# Altium PCB Debugger.pcbdoc
Units mil, origin at the board's own origin, x right, y up, seen from the top; angles counter-clockwise.
Board outline 1695 x 1065 mil, 2 copper layers (Top Layer, Bottom Layer); 5 components, 19 nets, 43 pads, 30 vias.
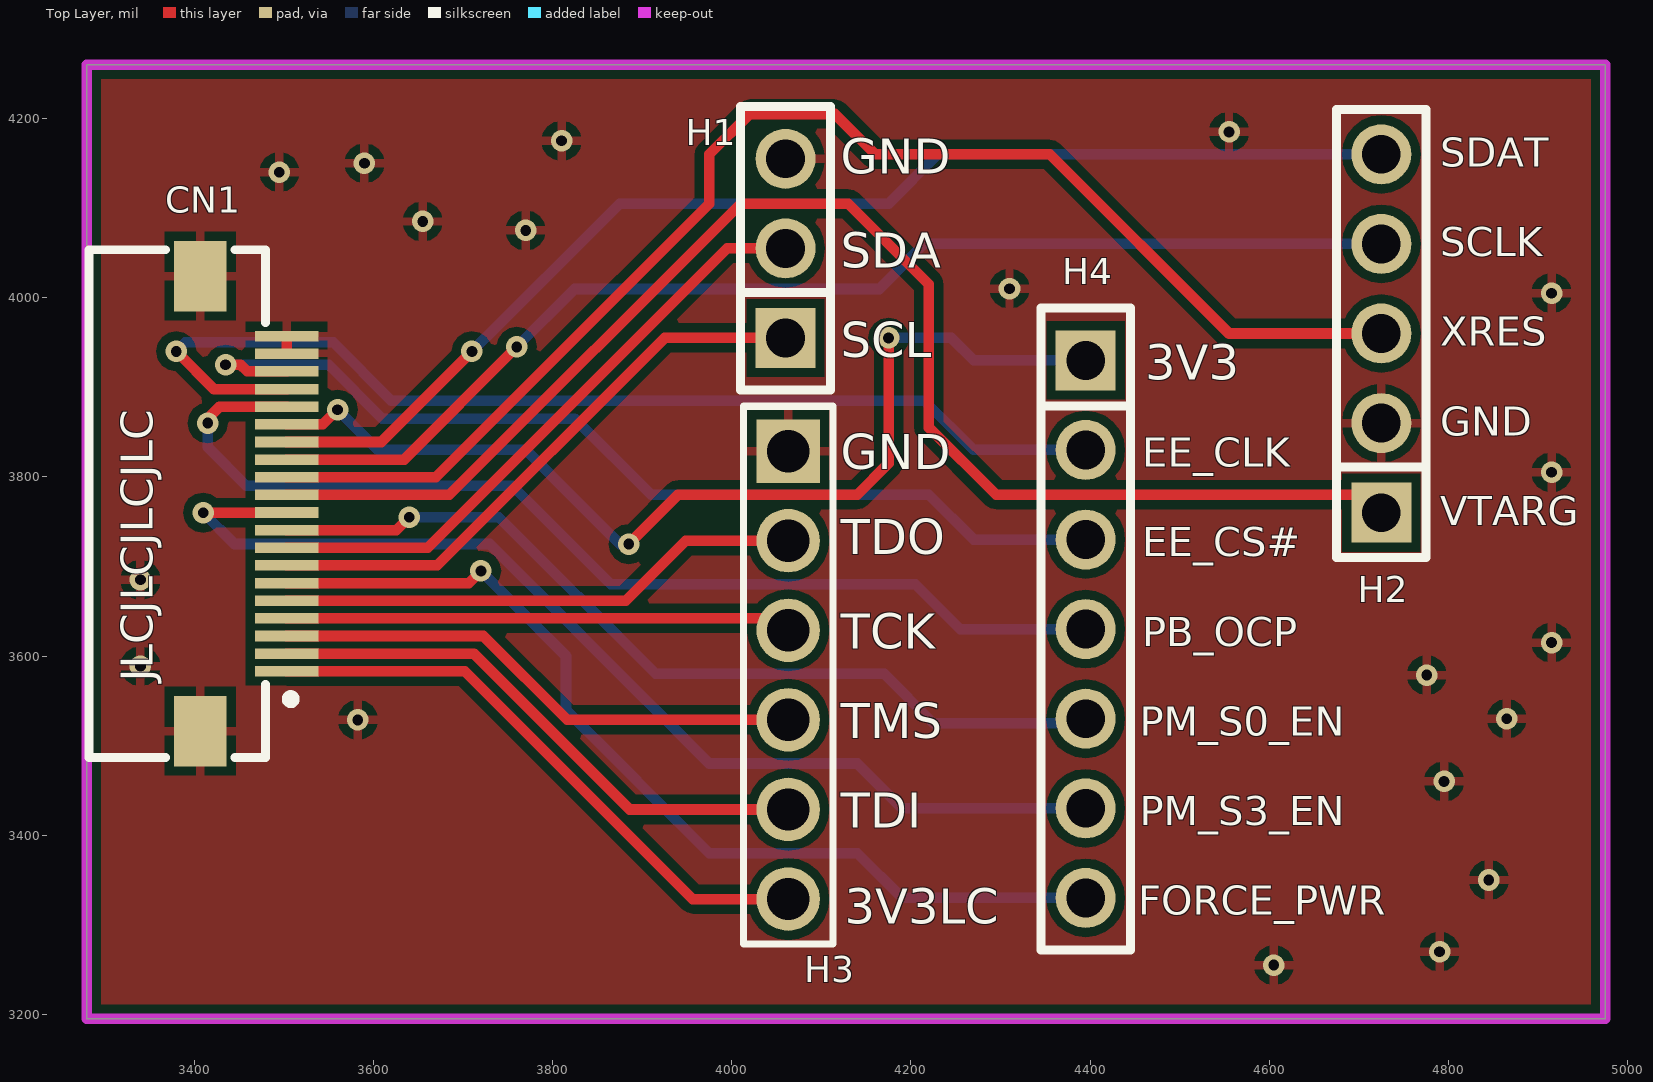
[diagram p0: Top Layer view]
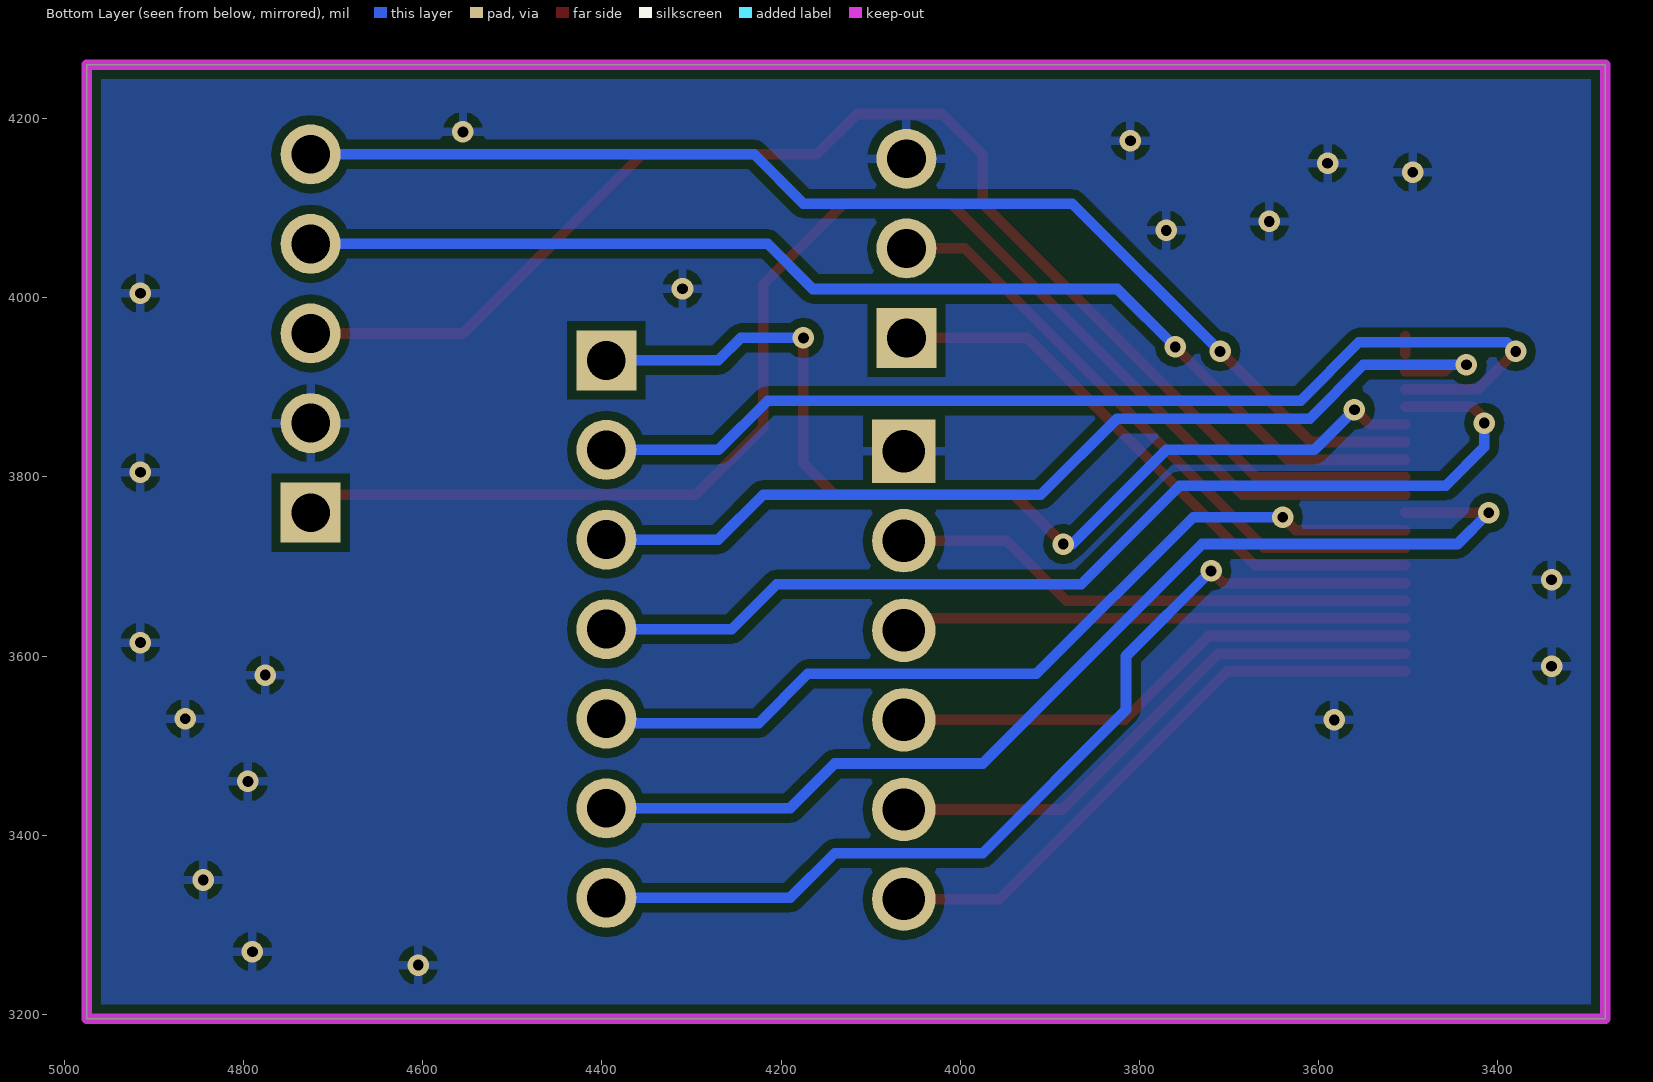
[diagram p1: Bottom Layer view, seen from below]

## Layer stack, top to bottom
Top Solder Mask Layer: solder mask 0.4, Solder Resist, Dk 3.5
Top Layer: signal copper 1.4
Dielectric1: dielectric 12.6, FR-4, Dk 4.8
Bottom Layer: signal copper 1.4
Bottom Solder Mask Layer: solder mask 0.4, Solder Resist, Dk 3.5

## Board outline
3280,3195 4975,3195 4975,4260 3280,4260

## Design rules (kind name [scope] priority, off if disabled: settings)
Clearance [All] p1: gap=10 ignorepadtopadclearanceinfootprint=FALSE except(0: Arc-Hole Track-Hole SMDPad-Hole THPad-Hole Via-Hole Fill-Hole Poly-Hole Region-Hole Text-Hole)
PolygonConnect [All] p1: connectstyle=Relief reliefconductorwidth=10 reliefentries=4 polygonreliefangle="90 Angle" airgapwidth=10
RoutingVias [All] p1: holewidth=28 width=50 viastyle="Through Hole" minholewidth=28 minwidth=50 maxholewidth=28 maxwidth=50
SolderMaskExpansion [All] p1: expansion=4 istentingtop=FALSE
Width [All] p1: maxlimit=10 minlimit=10 preferedwidth=10
30 further rules are at their usual default settings.

## Components (designator, comment, footprint, x,y, rotation, side; value= is the part's Value field where it differs from the comment)
CN1 "KH-FG0.5-H2.0-20PIN" FPC-SMD_KH-FG0.5-H2.0-20PIN 3455,3770 r270 top
H1 "HDR-M_2.54_1x3P" HDR-TH_3P-P2.54-V-M 4060,4055 r90 top
H2 "HDR-M_2.54_1x5P" HDR-TH_5P-P2.54-V-M 4725,3960 r90 top
H3 "HDR-M_2.54_1x6P" HDR-TH_6P-P2.54-V-M-1 4062.95,3578.71 r270 top
H4 "HDR-M_2.54_1x7P" HDR-TH_7P-P2.54-V-M 4395,3630 r270 top

## Footprints (in the part's own frame and the unit in brackets; to place one, negate y for a bottom-side part, rotate by r counter-clockwise, add the part's x,y. Pads: shape width x height; smd on the part's side, far side on the other; paste and mask are expansions set on the pad)
FPC-SMD_KH-FG0.5-H2.0-20PIN [mm]
  rect 0.3x1.8 smd paste+0 mask+0.051: 1(4.75,1.225) 2(4.25,1.225) 3(3.75,1.225) 4(3.25,1.225) 5(2.75,1.225) 6(2.25,1.225) 7(1.75,1.225) 8(1.25,1.225) 9(0.75,1.225) 10(0.25,1.225) 11(-0.25,1.225) 12(-0.75,1.225) 13(-1.25,1.225) 14(-1.75,1.225) 15(-2.25,1.225) 16(-2.75,1.225) 17(-3.25,1.225) 18(-3.75,1.225) 19(-4.25,1.225) 20(-4.75,1.225)
  rect 2x1.5 smd paste+0 mask+0.051: 21(-6.45,-1.225) 22(6.45,-1.225)
  silkscreen extent -7.2,-4.38 7.2,1.47
HDR-TH_3P-P2.54-V-M [mm]
  rect 1.7x1.7 hole 1.1 paste-2539.97 mask+0.051: 1(-2.54,0)
  round 1.7 hole 1.1 paste-2539.97 mask+0.051: 2(0,0) 3(2.54,0)
  silkscreen extent -4.02,-1.27 4.02,1.27
HDR-TH_5P-P2.54-V-M [mm]
  rect 1.7x1.7 hole 1.1 paste-2539.97 mask+0.051: 1(-5.08,0)
  round 1.7 hole 1.1 paste-2539.97 mask+0.051: 2(-2.54,0) 3(0,0) 4(2.54,0) 5(5.08,0)
  silkscreen extent -6.35,-1.27 6.35,1.27
HDR-TH_6P-P2.54-V-M-1 [mm]
  rect 1.8x1.8 hole 1.2 paste-2539.97 mask+0.051: 1(-6.35,0)
  round 1.8 hole 1.2 paste-2539.97 mask+0.051: 2(-3.81,0) 3(-1.27,0) 4(1.27,0) 5(3.81,0) 6(6.35,0)
  silkscreen extent -7.62,-1.27 7.62,1.27
HDR-TH_7P-P2.54-V-M [mm]
  rect 1.7x1.7 hole 1.1 paste-2539.97 mask+0.051: 1(-7.62,0)
  round 1.7 hole 1.1 paste-2539.97 mask+0.051: 2(-5.08,0) 3(-2.54,0) 4(0,0) 5(2.54,0) 6(5.08,0) 7(7.62,0)
  silkscreen extent -9.1,-1.27 9.1,1.27

## Via types
v1: diameter 24.02, hole 12.01, Top Layer to Bottom Layer, 30 vias

## Nets (pads, with @x,y where several pads share a name; then routed paths per layer and width w, separated by ;. In a path a pad name is that pad's centre, name@x,y a point inside that pad or via, vN(x,y) a via of type N, cw(c..) or ccw(c..) an arc to the next point about the centre after c; other vN are vias at no path point)
CCG5_OCP_P2: CN1.16 H4.4 | length 1189.7
  Top Layer w11.8: v1(3415,3860) 3415,3865.04 3428.23,3878.26 CN1.16
  Bottom Layer w11.8: v1(3415,3860) 3415,3833.26 3458.26,3790 3755,3790 3865,3680 4205,3680 4255,3630 H4.4
CCG5_VDDIO: CN1.11 H2.1 | length 1583.1
  Top Layer w11.8: CN1.11 3684.84,3779.84 4010,4105 4130,4105 4220,4015 4220,3855 4295,3780 4695,3780 H2.1@4715,3760
EE_CLK: CN1.17 H4.2 | length 1209.5
  Top Layer w11.8: v1(3380,3940) 3422.05,3897.95 CN1.17
  Bottom Layer w11.8: v1(3380,3940) 3390,3950 3555,3950 3620,3885 4215,3885 4270,3830 H4.2
EE_CS#: CN1.18 H4.3 | length 1112
  Top Layer w11.8: v1(3435,3925) 3451.69,3925 3459.05,3917.64 CN1.18
  Bottom Layer w11.8: v1(3435,3925) 3550,3925 3610,3865 3825,3865 3910,3780 4220,3780 4270,3730 H4.3
FORCE_PWR: CN1.6 H4.7 | length 1083.7
  Top Layer w11.8: CN1.6 3706.41,3681.41 v1(3720,3695)
  Bottom Layer w11.8: v1(3720,3695) 3815,3600 3815,3540 3975,3380 4140,3380 4190,3330 H4.7
GND: CN1.19 CN1.20 CN1.21 CN1.22 H1.3 H2.2 H3.1 | length 19.7
  Top Layer w11.8: CN1.19 CN1.20
  other v1: 4605,3255 4790,3270 4845,3350 4795,3460 3582.58,3528.71 4865,3530 4775.72,3578.71 3340,3588.58 4915,3615 3340,3685 4915,3805 4915,4005 4310,4010 3770,4075 3655,4085 3495,4140 3590,4150 3810,4175 4555,4185
I2C_SCL: CN1.7 H1.1 | length 661.9
  Top Layer w11.8: CN1.7 3671.11,3701.11 3925,3955 H1.1
I2C_SDA: CN1.8 H1.2 | length 695.2
  Top Layer w11.8: CN1.8 3660.78,3720.78 3995,4055 H1.2
PM_S0_EN: CN1.9 H4.5 | length 995.1
  Top Layer w11.8: CN1.9 3625.47,3740.47 v1(3640,3755)
  Bottom Layer w11.8: v1(3640,3755) 3740,3755 3915,3580 4170,3580 4225,3525 4390,3525 H4.5
PM_S3_EN: CN1.10 H4.6 | length 1215
  Top Layer w11.8: v1(3410,3760) 3503.07,3760 CN1.10
  Bottom Layer w11.8: v1(3410,3760) 3445,3725 3730,3725 3975,3480 4140,3480 4190,3430 H4.6
PW_VCC3V3: CN1.15 H4.1 | length 1148.3
  Top Layer w11.8: CN1.15 3543.57,3858.57 v1(3560,3875) ; v1(3885,3725) 3940,3780 4140,3780 4175,3815 v1(4175,3955)
  Bottom Layer w11.8: v1(3560,3875) 3605,3830 3770,3830 3875,3725 v1(3885,3725) ; v1(4175,3955) 4245,3955 4270,3930 H4.1
PW_VCC3V3_LC: CN1.1 H3.6 | length 665.1
  Top Layer w11.8: CN1.1 3702.01,3582.99 3956.29,3328.71 H3.6
SWD_CLK: CN1.13 H2.4 | length 1321.5
  Top Layer w11.8: CN1.13 3634.2,3819.2 v1(3760,3945)
  Bottom Layer w11.8: v1(3760,3945) 3824.65,4009.65 4164.65,4009.65 4215,4060 H2.4
SWD_DATA: CN1.14 H2.5 | length 1354.8
  Top Layer w11.8: CN1.14 3608.89,3838.89 v1(3710,3940)
  Bottom Layer w11.8: v1(3710,3940) 3875,4105 4175,4105 4230,4160 H2.5
SWD_XRES: CN1.12 H2.3 | length 1523.4
  Top Layer w11.8: CN1.12 3669.53,3799.53 3975,4105 3975,4160 4020,4205 4115,4205 4160,4160 4355,4160 4555,3960 H2.3
TCK: CN1.4 H3.3 | length 565.3
  Top Layer w11.8: CN1.4 4049.62,3642.05 H3.3
TDI: CN1.2 H3.5 | length 631.8
  Top Layer w11.8: CN1.2 3712.32,3602.68 3886.29,3428.71 H3.5
TDO: CN1.5 H3.2 | length 587.5
  Top Layer w11.8: CN1.5 3881.74,3661.74 3948.71,3728.71 H3.2
TMS: CN1.3 H3.4 | length 598.5
  Top Layer w11.8: CN1.3 3722.64,3622.36 3816.29,3528.71 H3.4

## Polygon pours and split planes (outlines as drawn)
GND on Top Layer "Top Layer-GND" (solid, remove dead copper, pour order 0): 3000,3000 5180,3000 5180,4375 3000,4375
GND on Bottom Layer "Bottom Layer-GND" (solid, remove dead copper, pour order 1): 3210,3115 5070,3115 5070,4350 3210,4350

## Keep-outs
Board Outline Layer:
  the board outline again, w11.8

## Silkscreen, mask and mechanical layers (free items; w line width, h text height)
Top Silkscreen Layer:
  text "SDAT" at 4790.8,4146.1 h32.45
  text "GND" at 4121.68,4138.32 h38.94
  text "SCLK" at 4790.8,4046.1 h32.45
  text "SDA" at 4121.68,4033.32 h38.94
  text "XRES" at 4790.8,3946.1 h32.45
  text "SCL" at 4121.68,3933.32 h38.94
  text "3V3" at 4461.68,3908.32 h38.94
  text "GND" at 4791,3846 h32.45
  text "EE_CLK" at 4457.95,3811.1 h32.45
  text "GND" at 4121.68,3808.32 h38.94
  text "VTARG" at 4791,3746 h32.45
  text "TDO" at 4121.68,3713.32 h38.94
  text "EE_CS#" at 4457.95,3711.1 h32.45
  text "PB_OCP" at 4457.95,3611.1 h32.45
  text "TCK" at 4121.68,3608.32 h38.94
  text "JLCJLCJLCJLC" at 3354,3571 h35.7 r90
  text "PM_S0_EN" at 4455.1,3511.1 h32.45
  text "TMS" at 4121.68,3508.32 h38.94
  text "PM_S3_EN" at 4455.1,3411.1 h32.45
  text "TDI" at 4121.68,3408.32 h38.94
  text "FORCE_PWR" at 4453.68,3311.1 h32.45
  text "3V3LC" at 4126,3301 h38.94
  text "21A-21110 TAMALES DP TBT MODULE DEBUGGER Rev 0.1" at 3305,3210 h44